# Altium PCB ife19_Elec_TS_accelpedal.PcbDoc
Units mm, origin at the board's own origin, x right, y up, seen from the top; angles counter-clockwise.
Board outline 43.62 x 43.17 mm, 2 copper layers (Top Layer, Bottom Layer); 5 components, 5 nets, 23 pads, 9 vias.
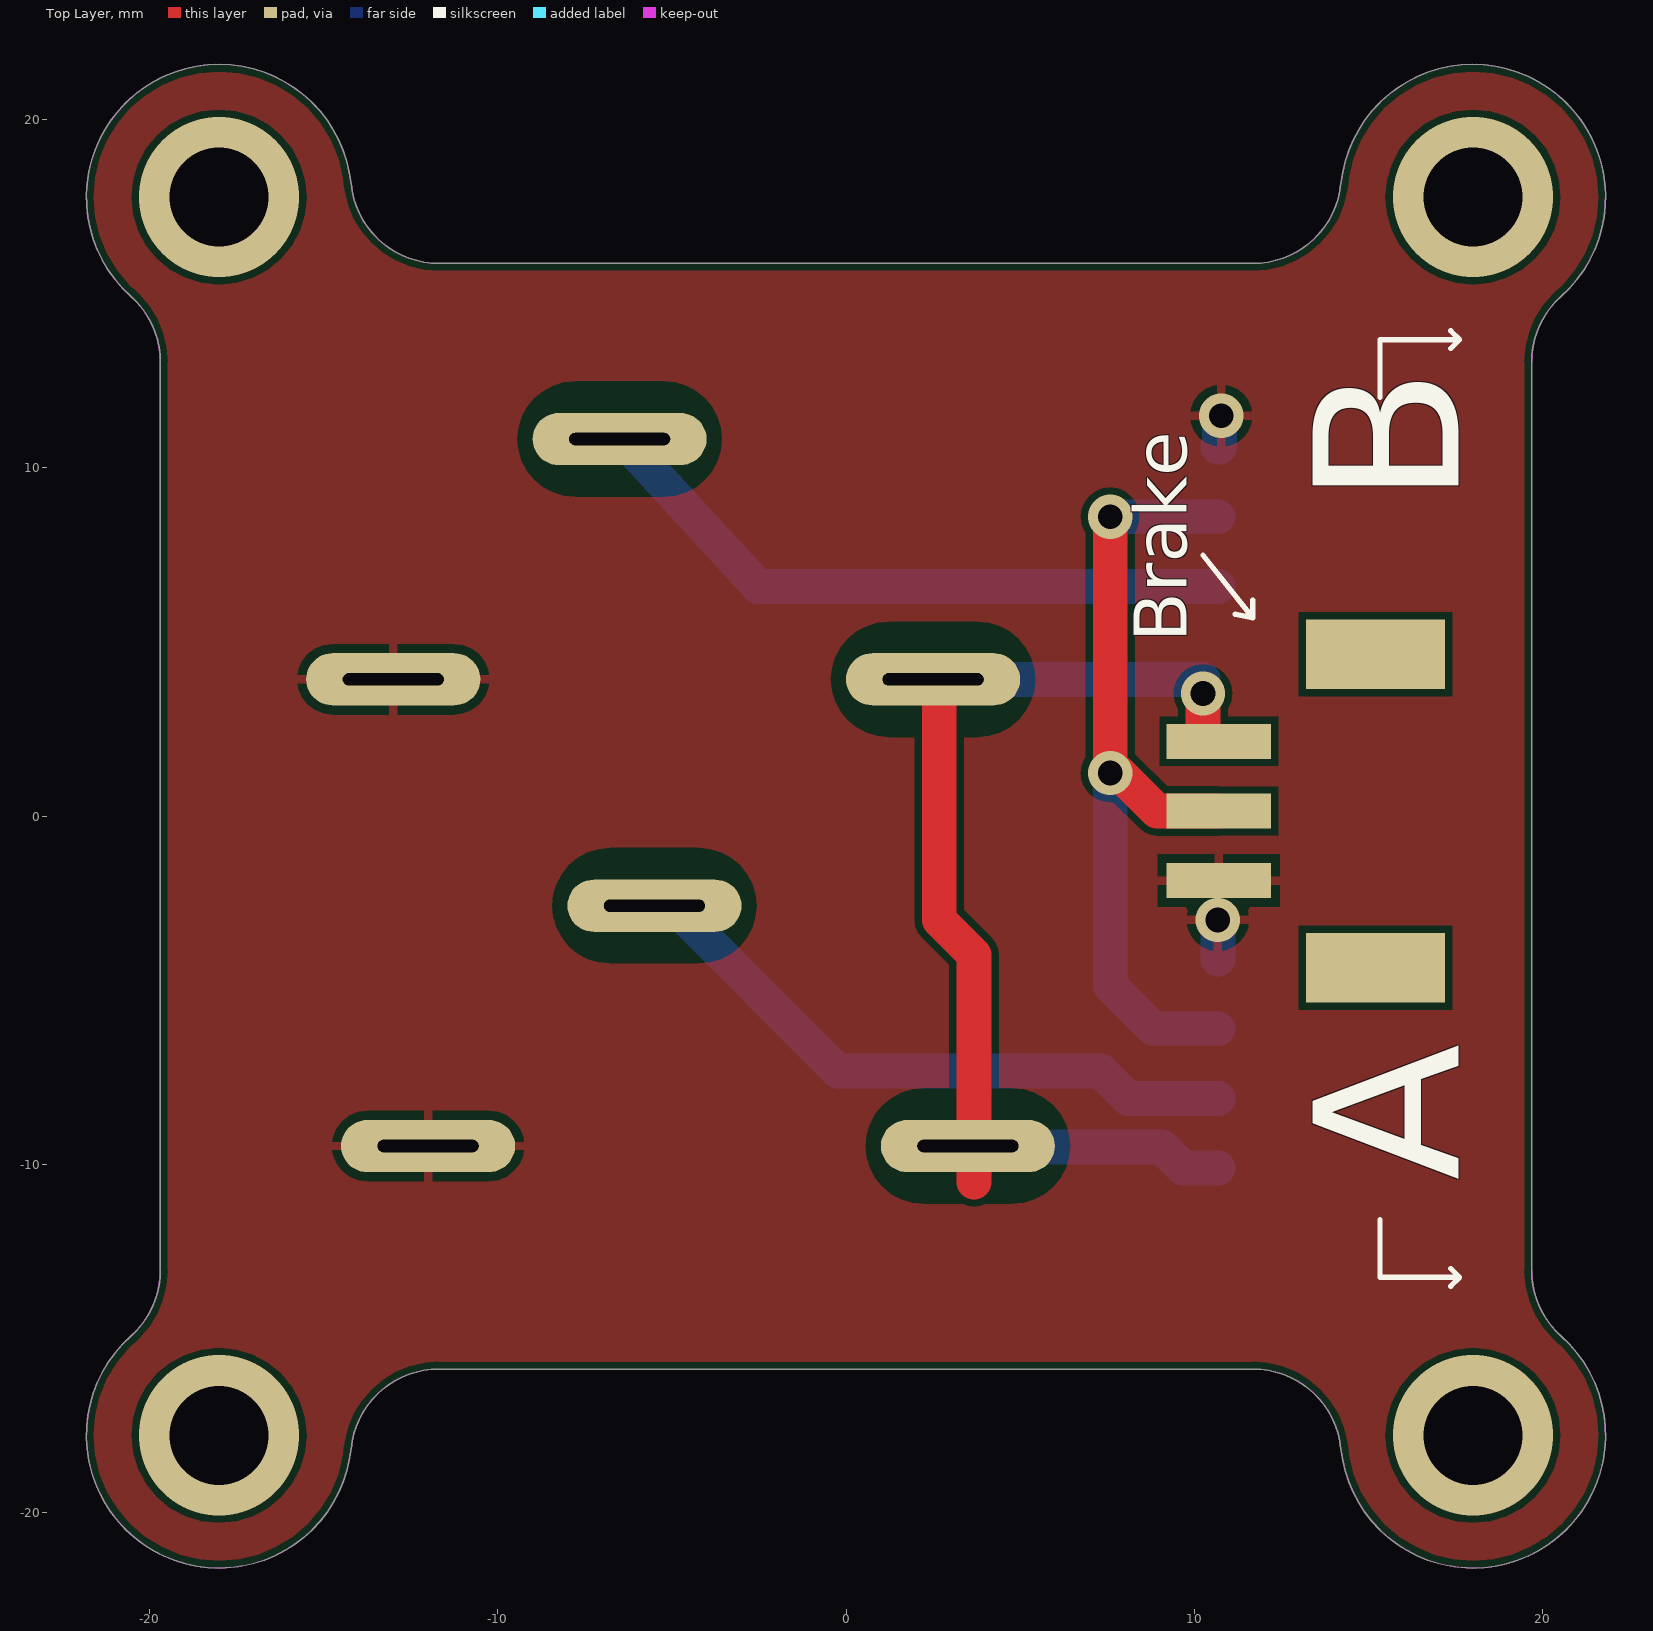
[diagram p0: Top Layer view]
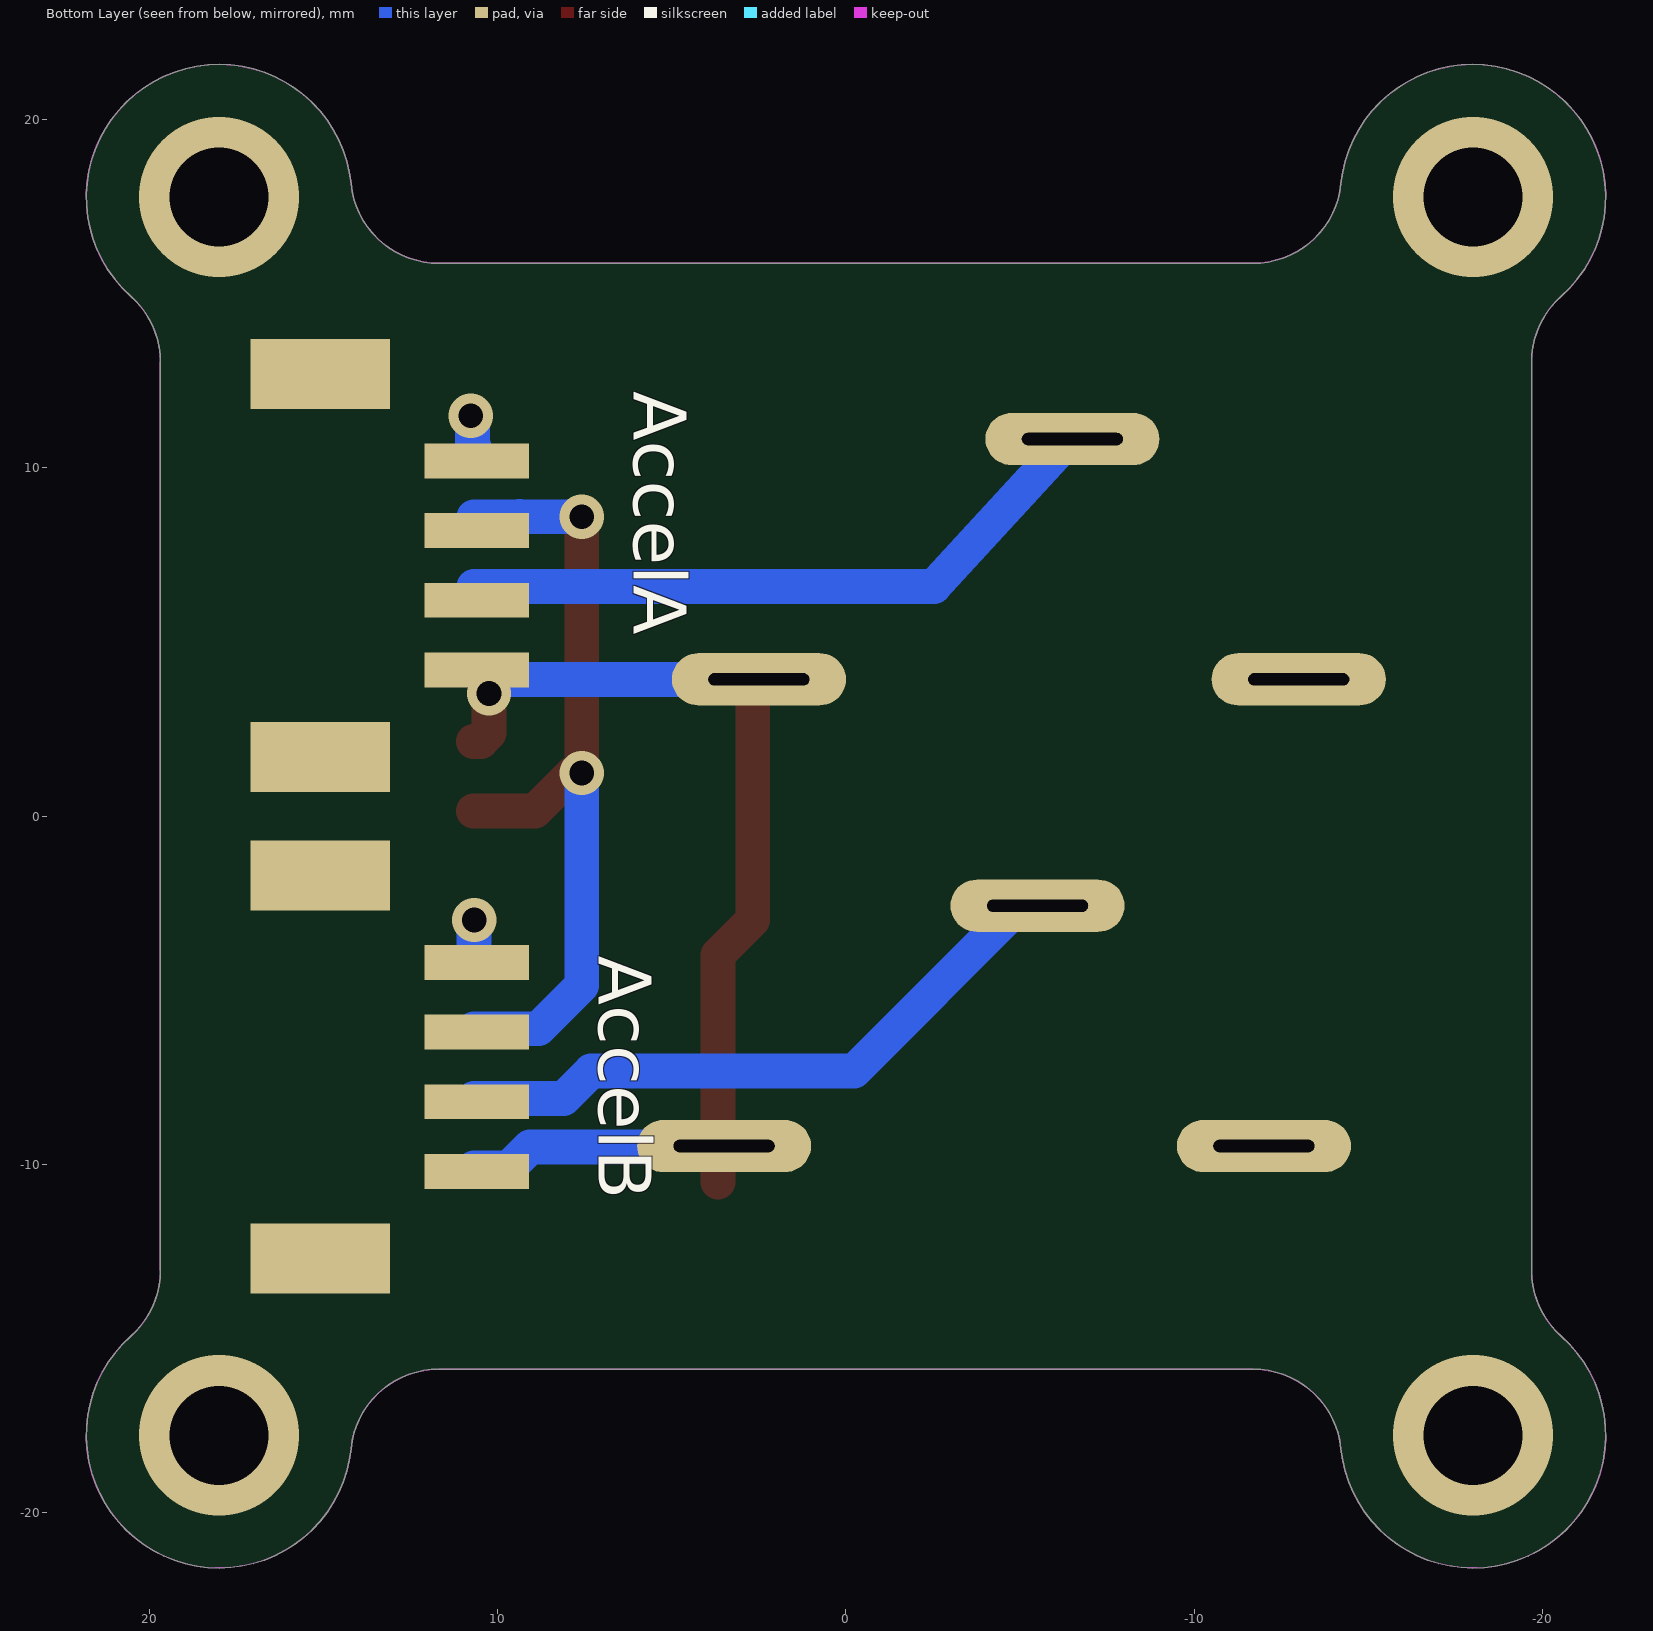
[diagram p1: Bottom Layer view, seen from below]

## Layer stack, top to bottom
Top Solder: solder mask 0.0102, Solder Resist, Dk 3.5
Top Layer: signal copper 0.0356
Dielectric 1: dielectric 0.32, FR-4, Dk 4.8
Bottom Layer: signal copper 0.0356
Bottom Solder: solder mask 0.0102, Solder Resist, Dk 3.5

## Board outline
-20.536,-14.932 ccw(c-22.225,-13.035) -19.685,-13.035 -19.685,13.035 ccw(c-22.225,13.035) -20.536,14.932 cw(c-18.002,17.777) -14.211,18.16 ccw(c-11.684,18.415) -11.684,15.875 11.684,15.875 ccw(c11.684,18.415) 14.211,18.16 cw(c18.002,17.777) 20.535,14.932 ccw(c22.225,13.035) 19.685,13.035 19.685,-13.035 ccw(c22.225,-13.035) 20.535,-14.932 cw(c18.002,-17.777) 14.211,-18.16 ccw(c11.684,-18.415) 11.684,-15.875 -11.684,-15.875 ccw(c-11.684,-18.415) -14.211,-18.16 cw(c-18.002,-17.777)

## Design rules (kind name [scope] priority, off if disabled: settings)
Clearance [All] p1: gap=0.2 ignorepadtopadclearanceinfootprint=FALSE
PolygonConnect [All] p1: connectstyle=Relief reliefconductorwidth=0.254 reliefentries=4 polygonreliefangle="90 Angle" airgapwidth=0.254
RoutingVias [All] p1: holewidth=0.711 width=1.27 viastyle="Through Hole" minholewidth=0.711 minwidth=1.27 maxholewidth=0.711 maxwidth=1.27
SolderMaskExpansion [All] p1: expansion=0.102
Width [All] p1: maxlimit=10 minlimit=0.152 preferedwidth=1
30 further rules are at their usual default settings.

## Components (designator, comment, footprint, x,y, rotation, side; value= is the part's Value field where it differs from the comment)
A "POT_BEI9605" POT_BEI9605 -5.5,-7.37 r180 top
AccelA "Molex 505575-04 4 Position 2.00mm pitch connector wire to board connector Datasheet" 505578-04 11.1,7.2 r90 bottom
AccelB "Molex 505575-04 4 Position 2.00mm pitch connector wire to board connector Datasheet" 505578-04 11.1,-7.2 r90 bottom
B "POT_BEI9605" POT_BEI9605 -6.5,6.03 r180 top
Brake "Molex 505575-03 3 Position 2.00mm pitch connector wire to board connector Datasheet" 505578-03 11.205,0.15 r270 top

## Footprints (in the part's own frame and the unit in brackets; to place one, negate y for a bottom-side part, rotate by r counter-clockwise, add the part's x,y. Pads: shape width x height; smd on the part's side, far side on the other; paste and mask are expansions set on the pad)
505578-03 [mm]
  rect 1x3 smd: 1(-2,-0.5) 2(0,-0.5) 3(2,-0.5)
  rect 2x4 smd: P$3(-4.5,4) P$4(4.5,4)
  body extent -5,-1.1 5,8.35, height 5.9
505578-04 [mm]
  rect 1x3 smd: 1(-3,-0.5) 2(-1,-0.5) 3(1,-0.5) 4(3,-0.5)
  rect 2x4 smd: P$3(-5.5,4) P$4(5.5,4)
  body extent -6,-1.02 6,8.43, height 5.9
POT_BEI9605 [mm]
  oval 5x1.5 hole 2.9 slot 0.35 at 90 deg: 1(6.5,2.1) 2(0,-4.8) 3(-9,2.1)
  body extent -13.45,-7.7 34.05,5, height 9

## Part data
AccelA AccelB: library part POS4_ML505578-04, Package=505575-04, DeviceSetName=505575-04, GateName_1=G$1, LibraryName="MOLEX Micro-Lock", SymbolName_1=4POS
Brake: library part POS3_ML505578-03, Package=505575-03, DeviceSetName=505575-03, GateName_1=G$1, LibraryName="MOLEX Micro-Lock", SymbolName_1=3POS

## Via types
v1: diameter 1.27, hole 0.711, Top Layer to Bottom Layer, 5 vias
v2: diameter 4.6, hole 2.844, Top Layer to Bottom Layer, 4 vias

## Nets (pads, with @x,y where several pads share a name; then routed paths per layer and width w, separated by ;. In a path a pad name is that pad's centre, name@x,y a point inside that pad or via, vN(x,y) a via of type N, cw(c..) or ccw(c..) an arc to the next point about the centre after c; other vN are vias at no path point)
5V: A.3 AccelA.1 AccelB.1 B.3 Brake.1 | length 34.1
  Top Layer w1: B.3@2.677,3.498 2.677,-2.979 3.677,-3.979 3.677,-10.502 ; v1(10.252,3.524) 10.252,2.381 10.483,2.15 Brake.1
  Bottom Layer w1: B.3@1.108,3.928 AccelA.1@10.252,3.928 ; A.3@2.124,-9.5 9.075,-9.5 9.677,-10.102 AccelB.1@10.677,-10.102
BRAKE: AccelA.3 AccelB.3 Brake.2 | length 23.7
  Top Layer w1: v1(7.585,8.598) v1(7.585,1.238) 7.839,1.238 8.927,0.15 Brake.2
  Bottom Layer w1: v1(7.585,1.238) 7.585,-4.858 8.829,-6.102 AccelB.3@10.677,-6.102 ; v1(7.585,8.598) 9.372,8.598 9.378,8.604 9.384,8.598 AccelA.3@10.677,8.598
GND: A.1 AccelA.4 AccelB.4 B.1 Brake.3 | length 2.1
  Bottom Layer w1: AccelB.4@10.677,-4.102 v1(10.677,-2.976) ; AccelA.4@10.677,10.598 10.727,10.598 10.727,11.448 v1(10.777,11.498)
TH_A: AccelA.2 B.2 | length 21.6
  Bottom Layer w1: B.2@-7.823,10.728 B.2@-6.323,10.728 ; B.2@-5.034,10.728 B.2@-6.323,10.728 ; AccelA.2@10.677,6.598 -2.523,6.598 B.2@-6.323,10.728
TH_B: A.2 AccelB.2 | length 20.9
  Bottom Layer w1: A.2@-6.823,-2.658 A.2@-5.5,-2.658 ; A.2 A.2@-5.5,-2.658 ; A.2@-3.823,-2.658 A.2@-4.892,-2.658 ; AccelB.2@10.677,-8.102 8.102,-8.102 7.32,-7.32 -0.23,-7.32 A.2@-4.892,-2.658 ; A.2@-5.5,-2.658 A.2@-4.892,-2.658
pads on no net: AccelA.P$3 AccelA.P$4 AccelB.P$3 AccelB.P$4 Brake.P$3 Brake.P$4
copper on no net:
  other v2: -18.002,-17.777 18.002,-17.777 -18.002,17.777 18.002,17.777

## Polygon pours and split planes (outlines as drawn)
GND on Top Layer "Top Layer-GND" (solid, remove dead copper, pour order 0): 22.5,-22 22.5,22 -22,22 -22,-22

## Keep-outs
Keep-Out Layer:
  the board outline again, w0.02

## Silkscreen, mask and mechanical layers (free items; w line width, h text height)
Top Overlay:
  lines w0.152: 10.252,7.498 11.677,5.698 ; 11.677,6.198 11.677,5.698 ; 15.332,-11.589 15.332,-13.24 17.618,-13.24 ; 15.332,12.033 15.332,13.684 17.618,13.684 ; 17.364,-12.986 17.618,-13.24 ; 17.364,13.43 17.618,13.684 ; 11.677,5.698 11.177,5.798 11.677,5.698 ; 17.618,-13.24 17.364,-13.494 17.618,-13.24 ; 17.618,13.684 17.364,13.938 17.618,13.684